# Altium PCB PCB_ATU_V1_IO_Module copy_2023-03-02.pcbdoc (part 1 of 2)
Units mm, origin at the board's own origin, x right, y up, seen from the top; angles counter-clockwise.
Board outline 157.45 x 177.29 mm, 2 copper layers (Top Layer, Bottom Layer); 216 components, 163 nets, 870 pads, 1 vias.
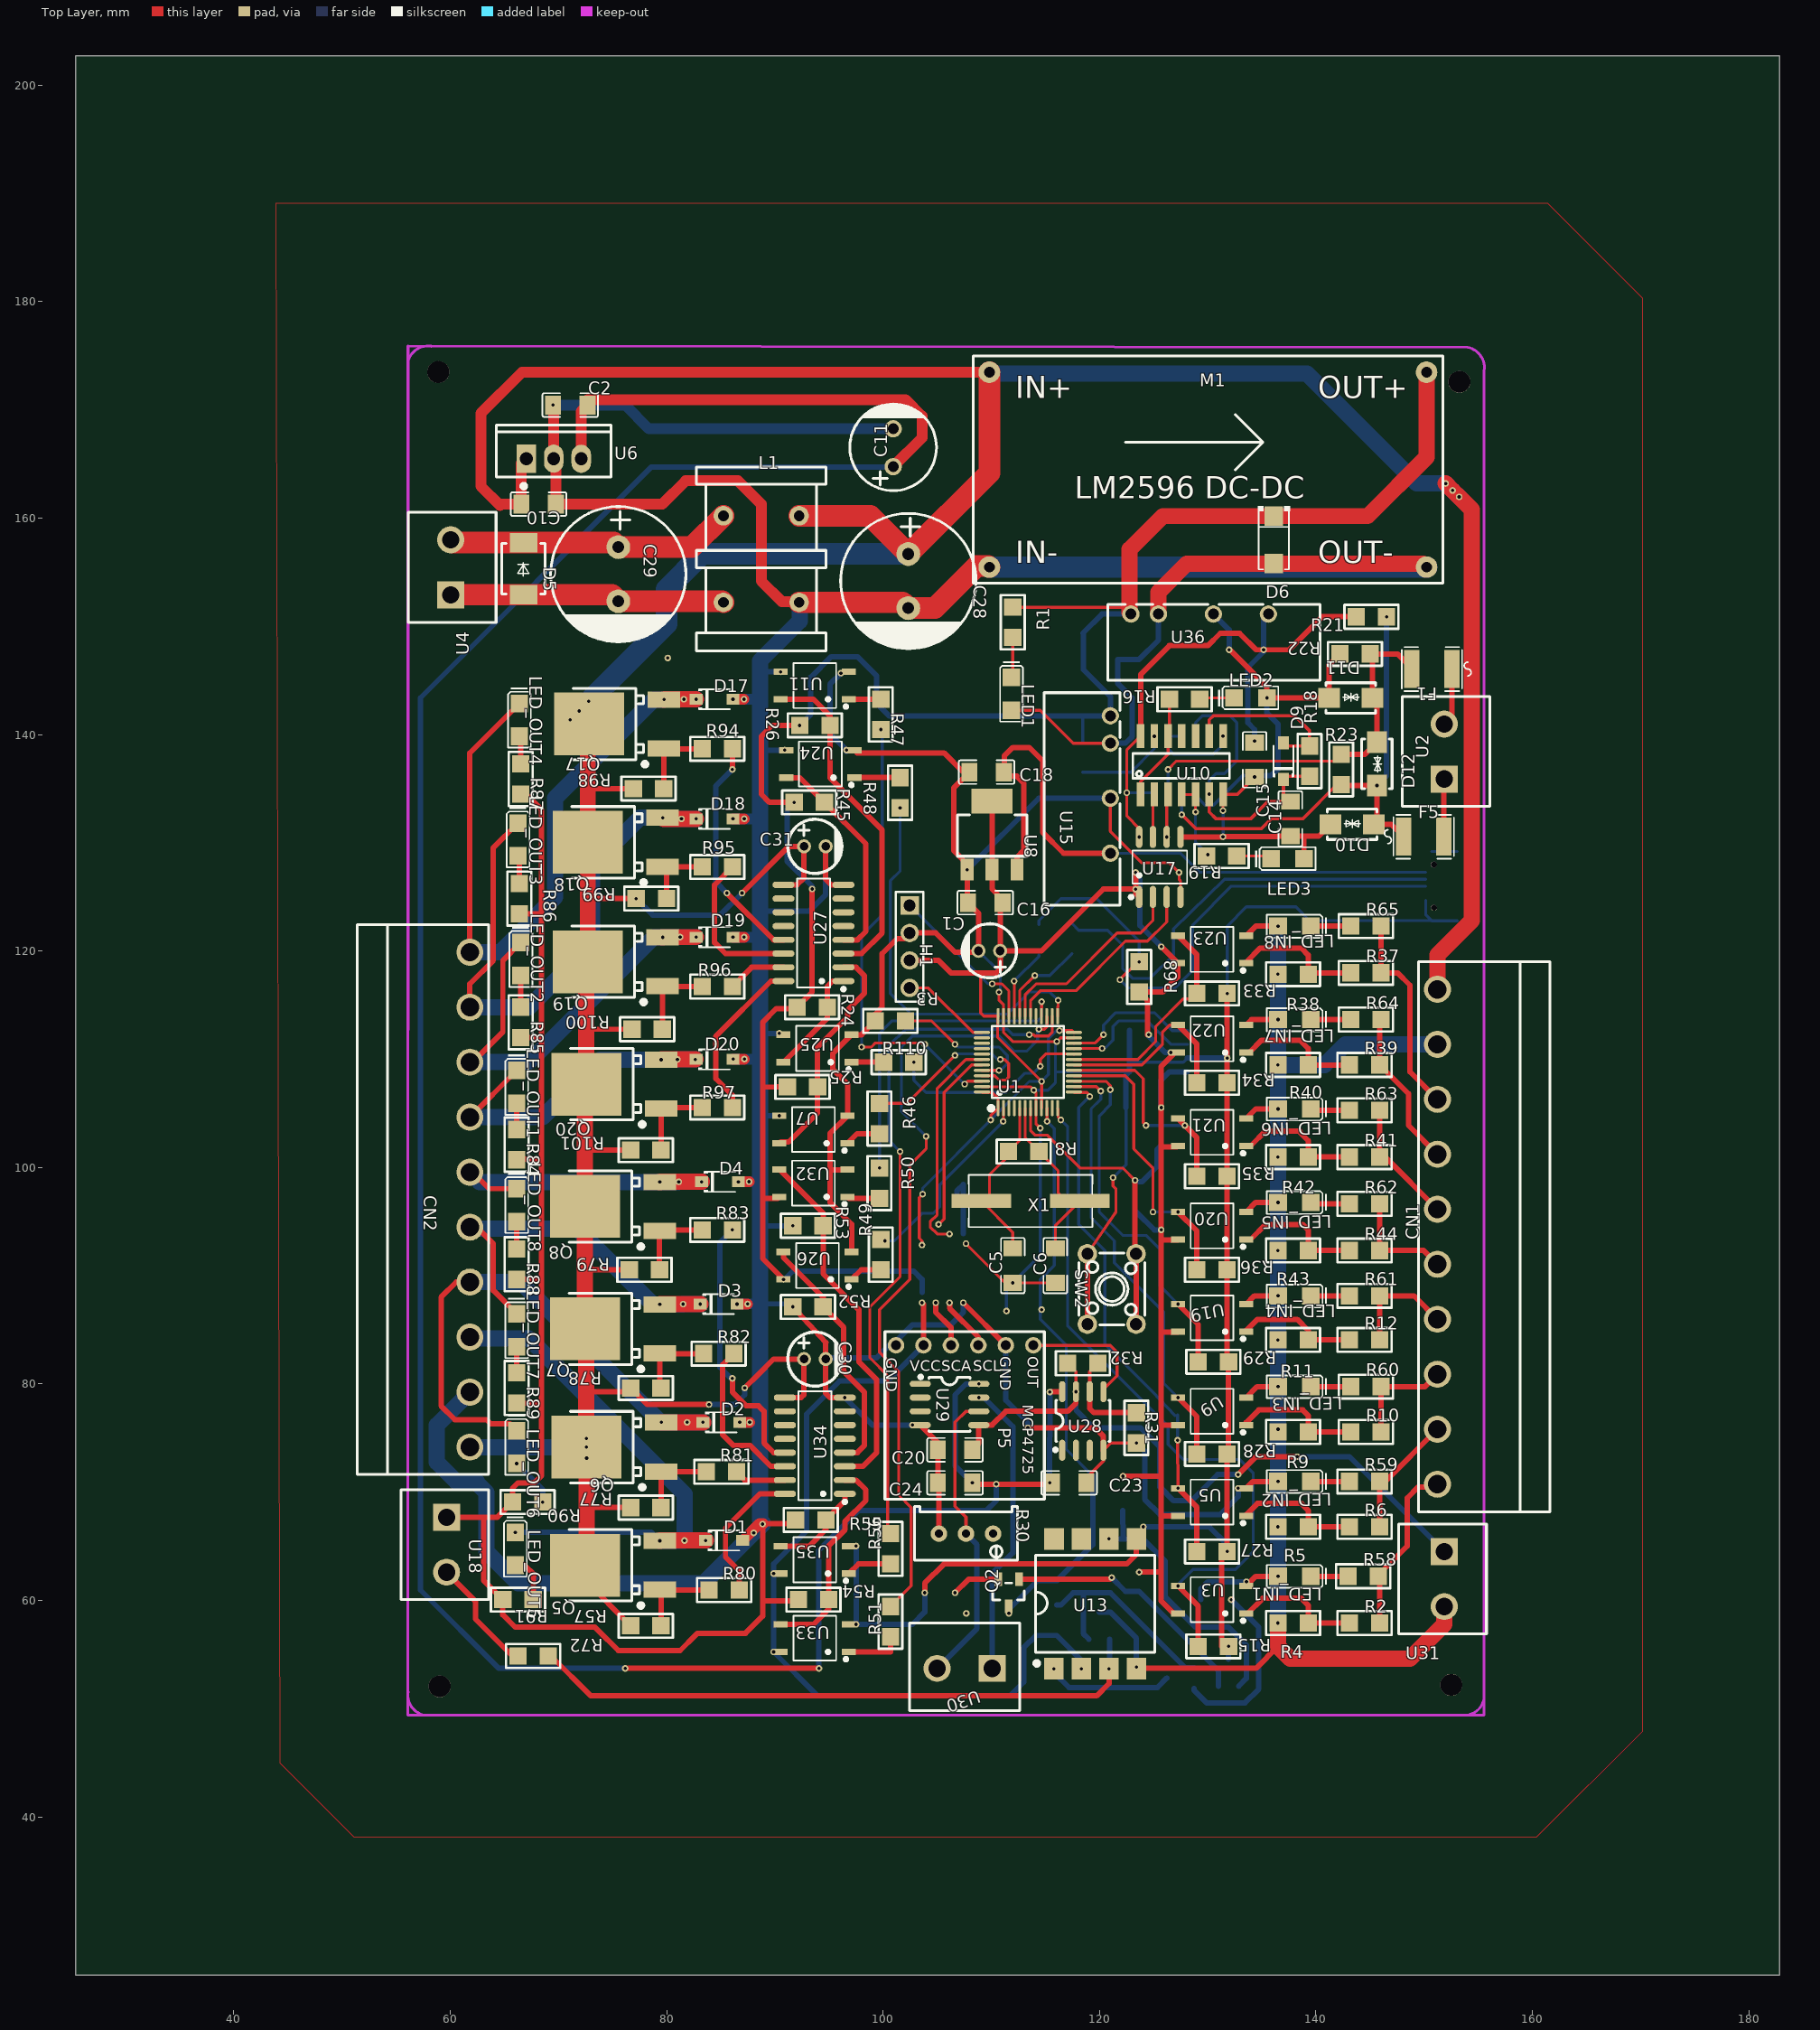
[diagram p0: Top Layer view]
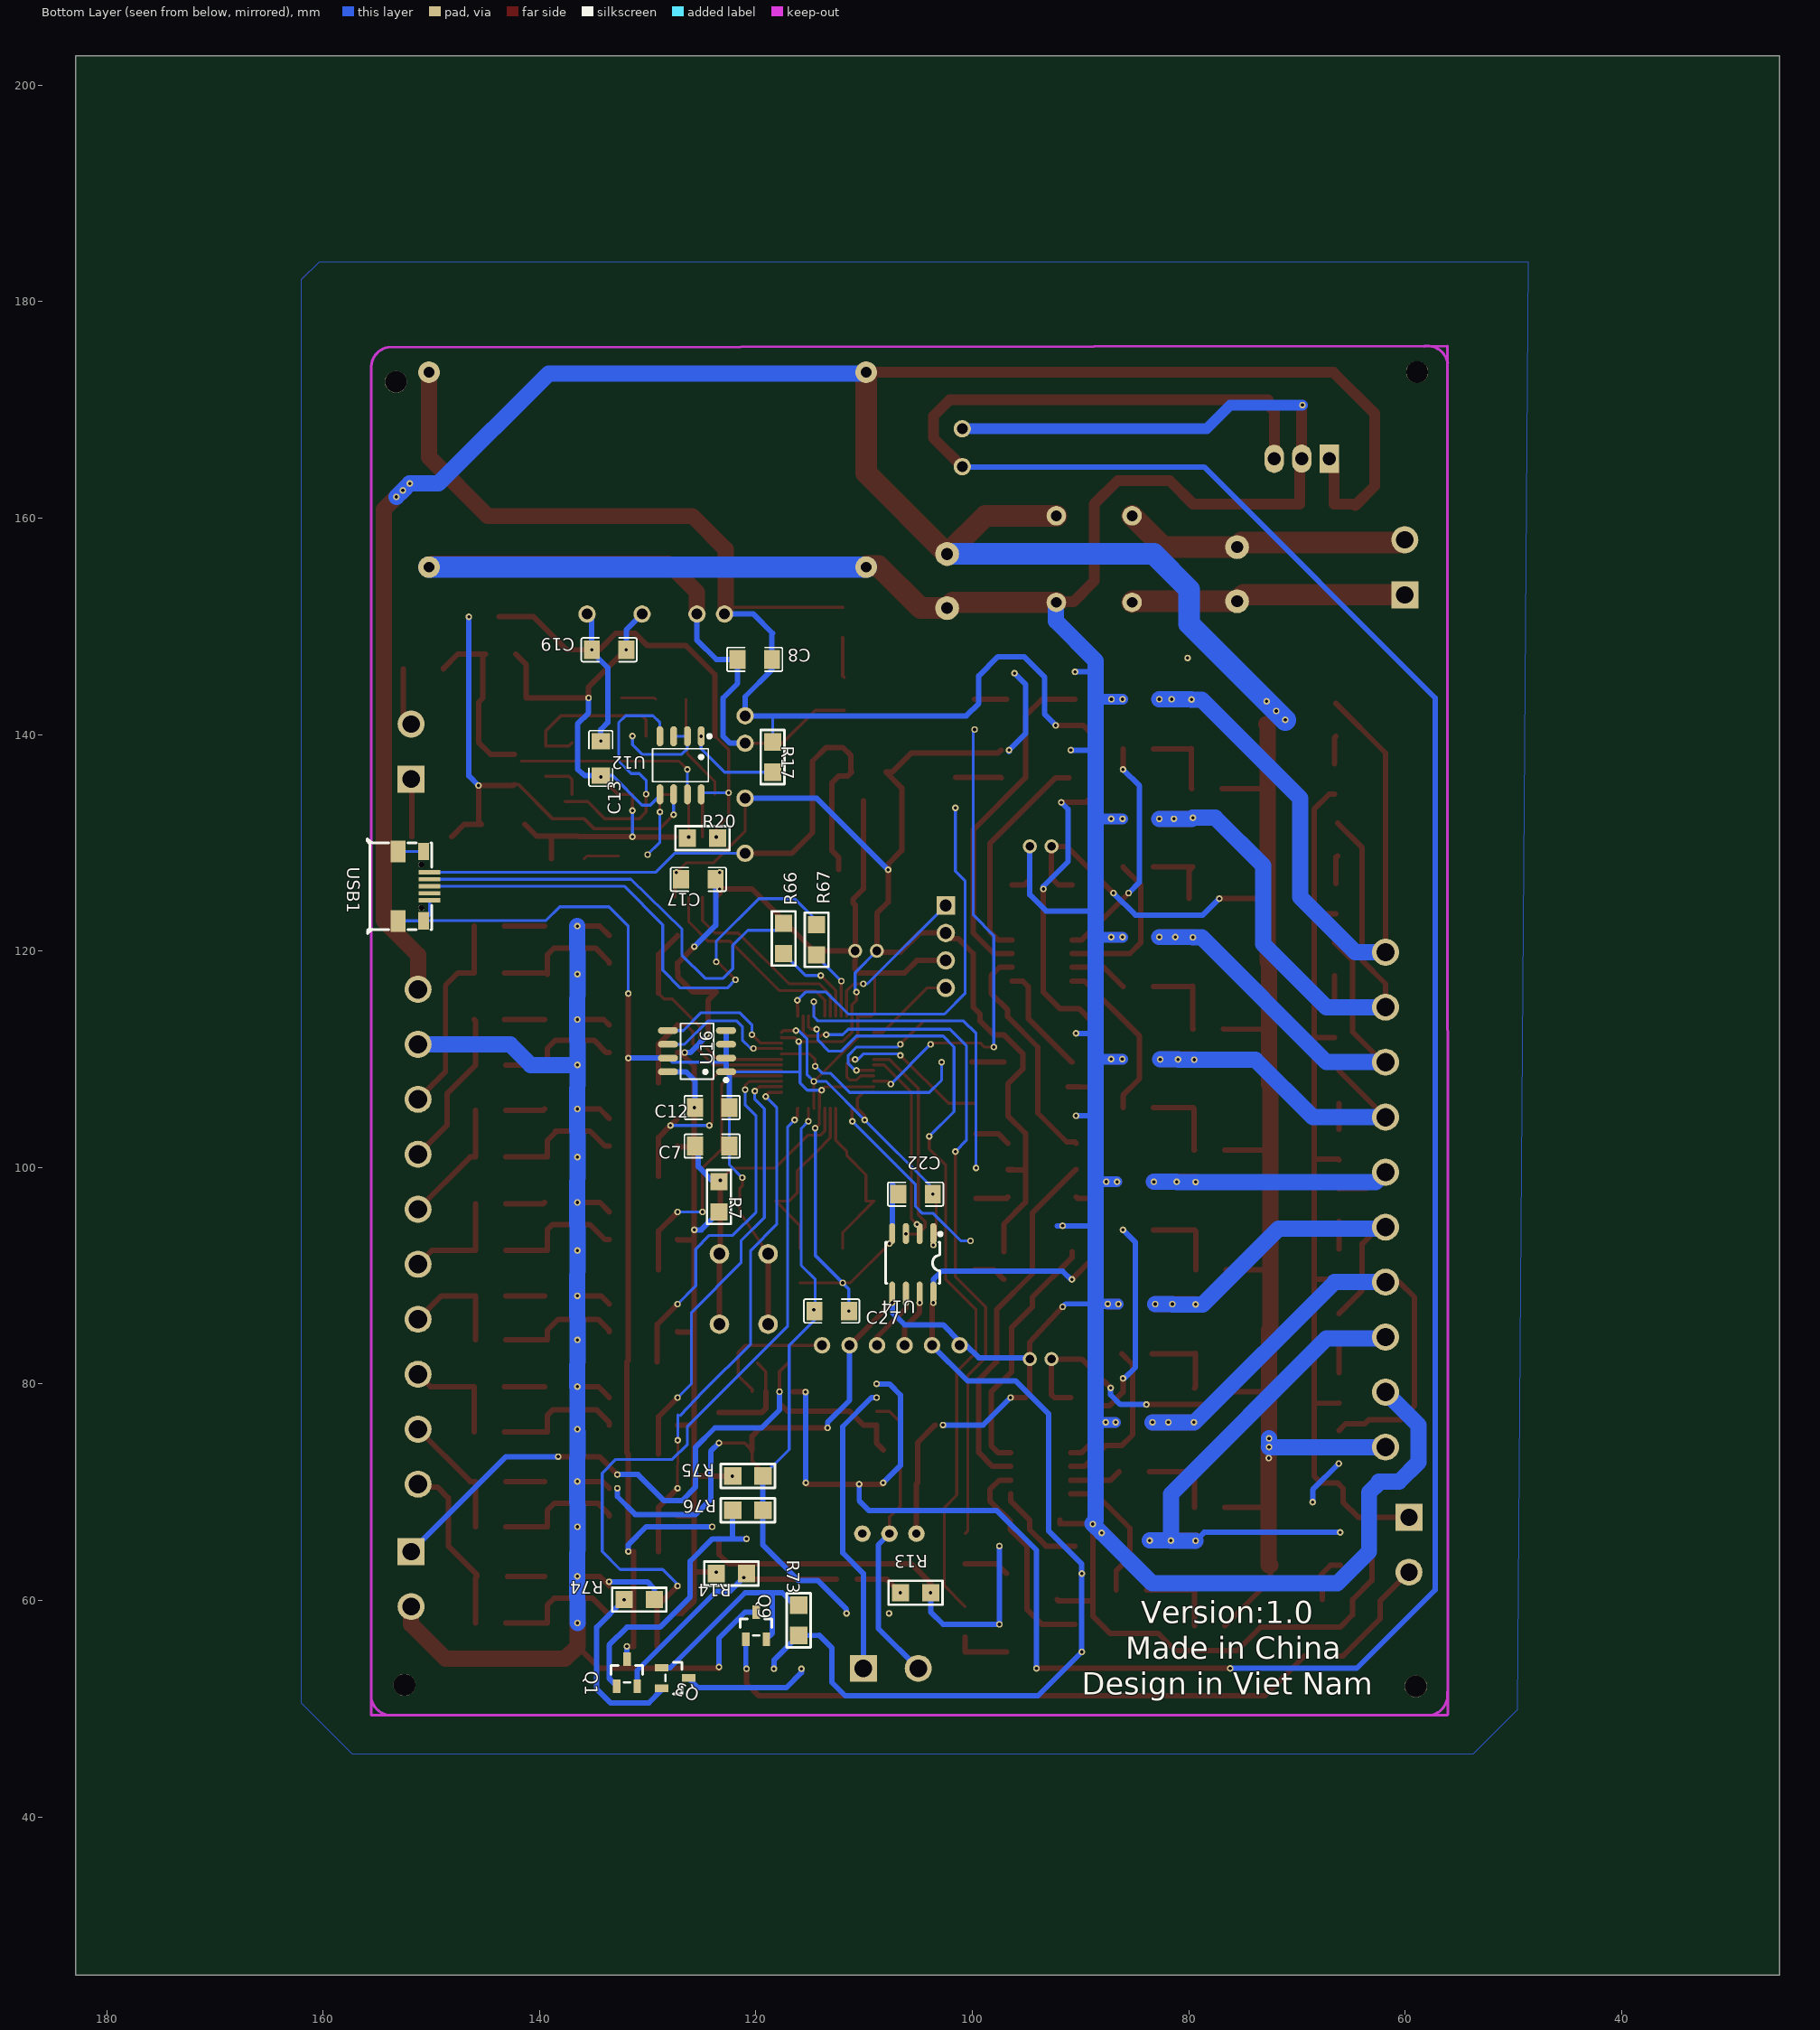
[diagram p1: Bottom Layer view, seen from below]

## Layer stack, top to bottom
Top Layer: signal copper (thickness not stored)
Dielectric: dielectric 0.32, FR-4, Dk 4.8
Bottom Layer: signal copper (thickness not stored)

## Board outline
182.846,25.4 25.4,25.4 25.4,202.691 182.846,202.691

## Components (designator, comment, footprint, x,y, rotation, side; value= is the part's Value field where it differs from the comment)
C1 "10uF" CAP-TH_BD5.0-P2.00-D0.8-FD 109.821,120.015 r180 top
C2 "100nF" C1206#1 71.086,170.434 r0 top
C5 "22pF" C1206#1 111.98,90.932 r90 top
C6 "22pF" C1206#1 115.917,90.932 r90 top
C7 "104" C1206#2 124.045,101.981 r180 bottom
C8 "100nF" C1206#2 120.108,146.939 r180 bottom
C10 "100nF" C1206#1 68.165,161.29 r180 top
C11 "100uF" CAP-TH_BD8.0-P3.50-D0.6-FD 100.931,166.497 r90 top
C12 "100nF" C1206#2 124.045,105.537 r0 bottom
C13 "100nF" C1206#2 134.332,137.795 r270 bottom
C14 "100nF" C1206#1 137.634,132.207 r90 top
C15 "100nF" C1206#1 134.332,137.668 r90 top
C16 "100nF" C1206#1 109.44,124.46 r0 top
C17 "100nF" C1206#2 125.315,126.619 r180 bottom
C18 "100nF" C1206#1 109.567,136.525 r0 top
C19 "100nF" C1206#2 133.57,147.828 r180 bottom
C20 "100nF" C1206#1 106.646,73.914 r180 top
C22 "100nF" C1206#2 105.249,97.536 r180 bottom
C23 "100nF" C1206#1 117.187,70.866 r0 top
C24 "100nF" C1206#1 106.646,70.866 r0 top
C27 "1nF" C1206#2 112.996,86.741 r0 bottom
C28 "1000uF" CAP-TH_BD12.5-P5.00-D0.6-FD 102.328,154.178 r270 top
C29 "1000uF" CAP-TH_BD12.5-P5.00-D0.6-FD 75.531,154.813 r270 top
C30 "10uF" CAP-TH_BD5.0-P2.00-D0.8-FD 93.692,82.296 r0 top
C31 "10uF" CAP-TH_BD5.0-P2.00-D0.8-FD 93.692,129.667 r0 top
CN1 "JL2EDGR-50810G01" CONN-TH_10P-P5.08_JL2EDGR 151.223,93.599 r90 top
CN2 "JL2EDGR-50810G01" CONN-TH_10P-P5.08_JL2EDGR 61.815,97.028 r270 top
D1 "1N4148W" SOD-123F_L2.7-W1.7-LS3.7-RD-1 85.31,65.532 r0 top
D2 "1N4148W" SOD-123F_L2.7-W1.7-LS3.7-RD-1 85.056,76.454 r0 top
D3 "1N4148W" SOD-123F_L2.7-W1.7-LS3.7-RD-1 84.802,87.376 r0 top
D4 "1N4148W" SOD-123F_L2.7-W1.7-LS3.7-RD-1 84.929,98.679 r0 top
D5 "SMBJ30A" SMB_L4.6-W3.6-LS5.3-R-RD 66.768,155.321 r270 top
D6 "P4SMA6.8A" SMA_L4.4-W2.6-LS5.0-RD 136.11,157.988 r270 top
D9 "1N4148" SOD-123F_L2.7-W1.7-LS3.7-RD-1 136.999,137.541 r90 top
D10 "SMAJ6.8CA" SMA_L4.4-W2.6-LS5.0-BI 143.349,131.699 r180 top
D11 "SMAJ6.8CA" SMA_L4.4-W2.6-LS5.0-BI 143.222,143.383 r180 top
D12 "SMAJ6.8CA" SMA_L4.4-W2.6-LS5.0-BI 145.635,137.287 r90 top
D17 "1N4148W" SOD-123F_L2.7-W1.7-LS3.7-RD-1 84.421,143.256 r0 top
D18 "1N4148W" SOD-123F_L2.7-W1.7-LS3.7-RD-1 84.421,132.207 r0 top
D19 "1N4148W" SOD-123F_L2.7-W1.7-LS3.7-RD-1 84.421,121.285 r0 top
D20 "1N4148W" SOD-123F_L2.7-W1.7-LS3.7-RD-1 84.421,109.982 r0 top
F1 "MF-MSMF010-2" F1812 150.715,146.05 r180 top
F5 "MF-MSMF010-2" F1812 149.953,130.556 r0 top
H1 "." HDR-TH_4P-P2.54-V-M-1 102.455,120.396 r270 top
L1 "Guangdong" FILTER-TH_4P-L16.5-W11.5-P8.00-D0.6-S7.00 88.739,156.21 r0 top
LED1 "red" LED1206-RD 111.853,143.764 r270 top
LED2 "red" LED1206-RD 133.951,143.383 r0 top
LED3 "red" LED1206-RD 137.38,128.524 r0 top
LED_IN1 "red" LED1206-RD 138.015,62.23 r180 top
LED_IN2 "red" LED1206-RD 138.015,70.993 r180 top
LED_IN3 "red" LED1206-RD 138.015,79.756 r180 top
LED_IN4 "red" LED1206-RD 138.015,88.138 r180 top
LED_IN5 "red" LED1206-RD 138.015,96.774 r180 top
LED_IN6 "red" LED1206-RD 138.015,105.41 r180 top
LED_IN7 "red" LED1206-RD 138.015,113.665 r180 top
LED_IN8 "red" LED1206-RD 138.015,122.301 r180 top
LED_OUT1 "red" LED1206-RD 66.133,107.442 r270 top
LED_OUT2 "red" LED1206-RD 66.514,119.253 r270 top
LED_OUT3 "red" LED1206-RD 66.26,130.302 r270 top
LED_OUT4 "red" LED1206-RD 66.387,141.351 r270 top
LED_OUT5 "red" LED1206-RD 66.006,64.77 r270 top
LED_OUT6 "red" LED1206-RD 66.133,74.168 r270 top
LED_OUT7 "red" LED1206-RD 66.133,84.963 r270 top
LED_OUT8 "red" LED1206-RD 66.133,96.52 r270 top
M1 "LM2596 DC-DC MODULE COPY" "LM2596 MODULE" 130.014,164.465 r0 top
P5 "MCP4725" "MCP4725 CHINESE BOARD 0X60H" 107.535,77.089 r270 top
Q1 "2N3906S" SOT-23-3_L2.9-W1.5-P1.90-LS2.6-TR 131.919,53.34 r90 bottom
Q2 "2n3904S" SOT-23-3_L2.9-W1.3-P1.90-LS2.4-TR#1 111.599,60.706 r90 top
Q3 "2n3904S" SOT-23-3_L2.9-W1.3-P1.90-LS2.4-TR#2 127.474,52.832 r180 bottom
Q5 "TIP127" TO-252-3_L6.5-W5.8-P4.58-TL 75.912,63.246 r180 top
Q6 "TIP127" TO-252-3_L6.5-W5.8-P4.58-TL 76.039,74.168 r180 top
Q7 "TIP127" TO-252-3_L6.5-W5.8-P4.58-TL 75.912,85.09 r180 top
Q8 "TIP127" TO-252-3_L6.5-W5.8-P4.58-TL 75.912,96.393 r180 top
Q9 "2N3906S" SOT-23-3_L2.9-W1.5-P1.90-LS2.6-TR 119.981,57.658 r90 bottom
Q17 "TIP127" TO-252-3_L6.5-W5.8-P4.58-TL 76.293,140.97 r180 top
Q18 "TIP127" TO-252-3_L6.5-W5.8-P4.58-TL 76.166,130.048 r180 top
Q19 "TIP127" TO-252-3_L6.5-W5.8-P4.58-TL 76.166,118.999 r180 top
Q20 "TIP127" TO-252-3_L6.5-W5.8-P4.58-TL 76.039,107.696 r180 top
R1 "1k5" R1206#1 111.98,150.368 r90 top
R2 "910" R1206#1 144.492,57.912 r0 top
R3 "10k" R1206#1 100.677,113.538 r180 top
R4 "240R" R1206#1 137.888,57.912 r0 top
R5 "240R" R1206#1 137.888,66.802 r0 top
R6 "910" R1206#1 144.492,66.802 r0 top
R7 "10k" R1206#2 123.41,97.282 r90 bottom
R8 "1M" R1206#1 112.996,101.473 r180 top
R9 "240R" R1206#1 137.888,75.565 r0 top
R10 "910" R1206#1 144.619,75.565 r0 top
R11 "240R" R1206#1 137.888,84.074 r0 top
R12 "910" R1206#1 144.492,84.074 r0 top
R13 "10R" R1206#2 105.249,60.706 r180 bottom
R14 "10k" R1206#2 122.267,62.484 r180 bottom
R15 "10k" R1206#1 130.522,55.753 r180 top
R16 "330" R1206#1 127.855,143.256 r180 top
R17 "4k7" R1206#2 118.457,137.922 r270 bottom
R18 "1k" R1206#1 139.412,137.541 r90 top
R19 "330" R1206#1 131.284,128.778 r180 top
R20 "4k7" R1206#2 124.934,130.429 r0 bottom
R21 "4k7" R1206#1 145.127,150.876 r0 top
R22 "4k7" R1206#1 143.603,147.447 r180 top
R23 "120" R1206#1 142.333,136.779 r270 top
R24 "1k5" R1206#1 93.438,114.808 r0 top
R25 "1k5" R1206#1 92.549,107.442 r180 top
R26 "1k5" R1206#1 93.692,140.843 r180 top
R27 "10k" R1206#1 130.395,64.516 r180 top
R28 "10k" R1206#1 130.395,73.533 r180 top
R29 "10k" R1206#1 130.522,82.042 r180 top
R30 "500" RES-ADJ-TH_3P-L9.5-W4.85-P2.50-BL-BS 107.662,66.167 r270 top
R31 "10k" R1206#1 123.41,75.946 r270 top
R32 "10k" R1206#1 118.457,81.915 r180 top
R33 "10k" R1206#1 130.395,116.078 r180 top
R34 "10k" R1206#1 130.395,107.823 r180 top
R35 "10k" R1206#1 130.395,99.187 r180 top
R36 "10k" R1206#1 130.395,90.551 r180 top
R37 "910" R1206#1 144.619,117.983 r0 top
R38 "240R" R1206#1 137.888,117.856 r0 top
R39 "910" R1206#1 144.492,109.474 r0 top
R40 "240R" R1206#1 137.888,109.474 r0 top
R41 "910" R1206#1 144.492,100.965 r0 top
R42 "240R" R1206#1 137.888,100.965 r0 top
R43 "240R" R1206#1 137.888,92.329 r0 top
R44 "910" R1206#1 144.492,92.329 r0 top
R45 "1k5" R1206#1 93.184,133.731 r180 top
R46 "100" R1206#1 99.661,104.521 r90 top
R47 "100" R1206#1 99.788,141.859 r270 top
R48 "100" R1206#1 101.566,134.62 r270 top
R49 "100" R1206#1 99.788,91.948 r90 top
R50 "100" R1206#1 99.661,98.552 r90 top
R51 "100" R1206#1 100.677,58.039 r90 top
R52 "1k5" R1206#1 93.057,87.122 r180 top
R53 "1k5" R1206#1 93.057,94.615 r180 top
R54 "1k5" R1206#1 93.565,60.071 r180 top
R55 "1k5" R1206#1 93.311,67.437 r0 top
R56 "100" R1206#1 100.677,64.77 r90 top
R57 "10k" R1206#1 78.071,57.658 r180 top
R58 "1k5" R1206#1 144.365,62.23 r0 top
R59 "1k5" R1206#1 144.492,70.993 r0 top
R60 "1k5" R1206#1 144.619,79.756 r0 top
R61 "1k5" R1206#1 144.492,88.138 r0 top
R62 "1k5" R1206#1 144.492,96.647 r0 top
R63 "1k5" R1206#1 144.492,105.283 r0 top
R64 "1k5" R1206#1 144.619,113.665 r0 top
R65 "1k5" R1206#1 144.619,122.301 r0 top
R66 "22R" R1206#2 117.441,121.158 r270 bottom
R67 "22R" R1206#2 114.393,121.031 r270 bottom
R68 "1k5" R1206#1 123.664,117.602 r90 top
R72 "68k" R1206#1 67.657,54.864 r180 top
R73 "1k8" R1206#2 116.044,58.166 r90 bottom
R74 "10R" R1206#2 130.776,60.071 r180 bottom
R75 "470R" R1206#2 120.743,71.501 r180 bottom
R76 "22k" R1206#2 120.743,68.326 r180 bottom
R77 "10k" R1206#1 78.071,68.58 r180 top
R78 "10k" R1206#1 78.071,79.629 r180 top
R79 "10k" R1206#1 77.944,90.551 r180 top
R80 "120R" R1206#1 85.31,60.96 r0 top
R81 "120R" R1206#1 85.056,71.882 r0 top
R82 "120R" R1206#1 84.802,82.804 r0 top
R83 "120R" R1206#1 84.675,94.234 r0 top
R84 "1k5" R1206#1 66.133,102.108 r270 top
R85 "1k5" R1206#1 66.514,113.411 r270 top
R86 "1k5" R1206#1 66.387,124.841 r270 top
R87 "1k5" R1206#1 66.514,135.89 r270 top
R88 "1k5" R1206#1 66.133,91.059 r270 top
R89 "1k5" R1206#1 66.133,79.629 r270 top
R90 "1k5" R1206#1 67.149,69.088 r180 top
R91 "1k5" R1206#1 66.26,60.071 r180 top
R94 "120R" R1206#1 84.675,138.684 r0 top
R95 "120R" R1206#1 84.675,127.762 r0 top
R96 "120R" R1206#1 84.675,116.713 r0 top
R97 "120R" R1206#1 84.675,105.537 r0 top
R98 "10k" R1206#1 78.325,135.001 r180 top
R99 "10k" R1206#1 78.579,124.841 r180 top
R100 "10k" R1206#1 78.198,112.776 r180 top
R101 "10k" R1206#1 78.071,101.6 r180 top
R110 "100" R1206#1 101.439,109.728 r0 top
SW2 "button" KEY-TH_4P-L6.0-W6.0-P4.50-LS6.5 121.124,88.773 r270 top
U1 "STM32F103C8T6" LQFP-48_L7.0-W7.0-P0.50-LS9.0-BL 113.377,109.728 r0 top
U2 "rs485" CONN-TH_DG127-5.08-02P-14-02A 151.858,138.43 r90 top
U3 "LTV357T-B" SOP-4_L4.4-W4.0-P2.54-LS7.0-TL 130.395,60.071 r180 top
U4 "12-24vdc" CONN-TH_DG127-5.08-02P-14-02A 60.037,155.448 r90 top
U5 "LTV357T-B" SOP-4_L4.4-W4.0-P2.54-LS7.0-TL 130.395,69.088 r180 top
U6 "7812" TO-220-3_L10.0-W4.5-P2.54-L 69.562,165.481 r0 top
U7 "LTV357T-B" SOP-4_L4.4-W4.0-P2.54-LS7.0-TL 93.565,103.505 r180 top
U8 "AMS1117-3.3" PG-SOT223-4_L6.5-W3.5-P2.30-LS7.0-BR 110.075,130.683 r270 top
U9 "LTV357T-B" SOP-4_L4.4-W4.0-P2.54-LS7.0-TL 130.395,77.47 r180 top
U10 "CD4069" SOP-14 127.601,137.16 r0 top
U11 "LTV357T-B" SOP-4_L4.4-W4.0-P2.54-LS7.0-TL 93.692,144.526 r180 top
U12 "MAX485ED" SOP-8_L4.9-W3.9-P1.27-LS6.0-BL 126.966,137.16 r180 bottom
U13 "HCNR201-500E" OPTO-SMD-8P_L11.0-W9.0-P2.54-LS12.4-BL 119.6,59.69 r0 top
U14 "π120U31" SOIC-8_L5.0-W4.0-P1.27-LS6.0-BL#1 105.503,91.186 r180 bottom
U15 "IB0505S-2W" PWRM-TH_IBXXXXS-2W 120.997,135.382 r270 top
U16 "AT24C32M/TR" SOP-8_L4.9-W3.9-P1.27-LS6.0-BL 125.442,110.744 r270 bottom
U17 "π122U31" SOIC-8_L4.9-W3.9-P1.27-LS6.0-BL 125.569,127.762 r0 top
U18 "0-10V IN" CONN-TH_DG127-5.08-02P-14-02A 59.656,65.151 r270 top
U19 "LTV357T-B" SOP-4_L4.4-W4.0-P2.54-LS7.0-TL 130.395,86.106 r180 top
U20 "LTV357T-B" SOP-4_L4.4-W4.0-P2.54-LS7.0-TL 130.395,94.615 r180 top
U21 "LTV357T-B" SOP-4_L4.4-W4.0-P2.54-LS7.0-TL 130.395,103.251 r180 top
U22 "LTV357T-B" SOP-4_L4.4-W4.0-P2.54-LS7.0-TL 130.395,111.887 r180 top
U23 "LTV357T-B" SOP-4_L4.4-W4.0-P2.54-LS7.0-TL 130.395,120.142 r180 top
U24 "LTV357T-B" SOP-4_L4.4-W4.0-P2.54-LS7.0-TL 94.2,137.287 r180 top
U25 "LTV357T-B" SOP-4_L4.4-W4.0-P2.54-LS7.0-TL 93.946,110.998 r180 top
U26 "LTV357T-B" SOP-4_L4.4-W4.0-P2.54-LS7.0-TL 93.946,90.932 r180 top
U27 "ULN2003" SOP-16_L9.9-W3.9-P1.27-LS6.0-BL 93.565,121.666 r90 top
U28 "LM358D" SOIC-8_L5.0-W4.0-P1.27-LS6.0-BL#2 118.457,76.581 r0 top
U29 "LM358D" SOIC-8_L5.0-W4.0-P1.27-LS6.0-BL#2 106.138,78.105 r270 top
U30 "0-20ma" CONN-TH_DG127-5.08-02P-14-02A 107.535,53.721 r180 top
U31 "0-10v" CONN-TH_DG127-5.08-02P-14-02A 151.858,61.976 r270 top
U32 "LTV357T-B" SOP-4_L4.4-W4.0-P2.54-LS7.0-TL 93.565,98.552 r180 top
U33 "LTV357T-B" SOP-4_L4.4-W4.0-P2.54-LS7.0-TL 93.692,56.515 r180 top
U34 "ULN2003" SOP-16_L9.9-W3.9-P1.27-LS6.0-BL 93.692,74.295 r90 top
U35 "LTV357T-B" SOP-4_L4.4-W4.0-P2.54-LS7.0-TL 93.692,63.754 r180 top
U36 "IB0505S-2W" PWRM-TH_IBXXXXS-2W 129.252,151.13 r0 top
USB1 "MICROQTJ" MICRO-USB-SMD_MICROQTJ 151.604,125.984 r90 bottom
X1 "8MHz" HC-49S_L11.4-W4.8 113.631,96.901 r0 top
? "" ? 105.63,188.468 r0 top
? "" ? 47.189,112.712 r0 top

## Footprints (in the part's own frame and the unit in brackets; to place one, negate y for a bottom-side part, rotate by r counter-clockwise, add the part's x,y. Pads: shape width x height; smd on the part's side, far side on the other; paste and mask are expansions set on the pad)
C1206#1 [mm]
  rect 1.485x1.728 smd: 1(-1.593,0) 2(1.593,0)
  silkscreen extent -2.56,-1.09 2.56,1.09
C1206#2 [mm]
  rect 1.485x1.728 smd: 1(1.593,0) 2(-1.593,0)
  silkscreen extent -2.56,-1.09 2.56,1.09
CAP-TH_BD5.0-P2.00-D0.8-FD [mm]
  round 1.3 hole 0.8: 1(-1,0) 2(1,0)
  silkscreen extent -2.5,-2.5 2.5,2.5
CAP-TH_BD8.0-P3.50-D0.6-FD [mm]
  round 1.6 hole 1: 1(-1.75,0) 2(1.75,0)
  silkscreen extent -3.96,-4 4.04,4
CAP-TH_BD12.5-P5.00-D0.6-FD [mm]
  round 2.2 hole 1.1: 1(-2.5,0) 2(2.5,0)
  silkscreen extent -6.25,-6.25 6.25,6.25
CONN-TH_10P-P5.08_JL2EDGR [mm]
  round 2.5 hole 1.7: 1(-22.86,0) 2(-17.78,0) 3(-12.7,0) 4(-7.62,0) 5(-2.54,0) 6(2.54,0) 7(7.62,0) 8(12.7,0) 9(17.78,0) 10(22.86,0)
  silkscreen extent -25.4,-10.4 25.4,1.75
CONN-TH_DG127-5.08-02P-14-02A [mm]
  rect 2.5x2.5 hole 1.6: 1(-2.54,0)
  round 2.5 hole 1.6: 2(2.54,0)
  silkscreen extent -5.08,-4.2 5.08,3.9
F1812 [mm]
  rect 1.407x3.499 smd: 1(-1.853,0) 2(1.853,0)
  silkscreen extent -3.62,-2.03 2.79,2.03
FILTER-TH_4P-L16.5-W11.5-P8.00-D0.6-S7.00 [mm]
  round 1.8 hole 1: 1(-3.5,-4) 2(3.5,-4) 3(3.5,4) 4(-3.5,4)
  silkscreen extent -6,-8.5 6,8.5
HC-49S_L11.4-W4.8 [mm]
  rect 5.5x1.3 smd: 1(4.553,0) 2(-4.553,0)
  silkscreen extent -5.71,-2.41 5.71,2.41
HDR-TH_4P-P2.54-V-M-1 [mm]
  rect 1.7x1.7 hole 1.1: 1(-3.81,0)
  round 1.7 hole 1.1: 2(-1.27,0) 3(1.27,0) 4(3.81,0)
  silkscreen extent -5.08,-1.27 5.08,1.27
KEY-TH_4P-L6.0-W6.0-P4.50-LS6.5 [mm]
  round 1.8 hole 1.1: 1(-3.251,-2.25) 2(3.251,-2.25) 3(3.251,2.25) 4(-3.251,2.25)
  silkscreen extent -3.3,-3.05 3.3,3.05
LED1206-RD [mm]
  rect 1.635x1.6 smd: 1(-1.517,0) 2(1.517,0)
  silkscreen extent -2.99,-1.04 2.57,1.07
"LM2596 MODULE" [mm]
  round 2 hole 1: 1(-20.201,8.999) 2(-20.201,-8.999) 3(20.201,-8.999) 4(20.201,8.999)
  silkscreen extent -21.7,-10.5 21.7,10.5
LQFP-48_L7.0-W7.0-P0.50-LS9.0-BL [mm]
  oval 0.27x1.5 smd: 1(-2.75,-4.25) 2(-2.25,-4.25) 3(-1.75,-4.25) 4(-1.25,-4.25) 5(-0.75,-4.25) 6(-0.25,-4.25) 7(0.25,-4.25) 8(0.75,-4.25) 9(1.25,-4.25) 10(1.75,-4.25) 11(2.25,-4.25) 12(2.75,-4.25) 25(2.75,4.25) 26(2.25,4.25) 27(1.75,4.25) 28(1.25,4.25) 29(0.75,4.25) 30(0.25,4.25) 31(-0.25,4.25) 32(-0.75,4.25) 33(-1.25,4.25) 34(-1.75,4.25) 35(-2.25,4.25) 36(-2.75,4.25)
  oval 1.5x0.27 smd: 13(4.25,-2.75) 14(4.25,-2.25) 15(4.25,-1.75) 16(4.25,-1.25) 17(4.25,-0.75) 18(4.25,-0.25) 19(4.25,0.25) 20(4.25,0.75) 21(4.25,1.25) 22(4.25,1.75) 23(4.25,2.25) 24(4.25,2.75) 37(-4.25,2.75) 38(-4.25,2.25) 39(-4.25,1.75) 40(-4.25,1.25) 41(-4.25,0.75) 42(-4.25,0.25) 43(-4.25,-0.25) 44(-4.25,-0.75) 45(-4.25,-1.25) 46(-4.25,-1.75) 47(-4.25,-2.25) 48(-4.25,-2.75)
  silkscreen extent -3.59,-4.46 3.3,3.34
"MCP4725 CHINESE BOARD 0X60H" [mil]
  round 60 hole 36: 1(-255,250) 2(-255,150) 3(-255,50) 4(-255,-50) 5(-255,-150) 6(-255,-250)
  silkscreen extent -305,-290 305,290
MICRO-USB-SMD_MICROQTJ [mm]
  rect 0.4x2 smd: 1(1.3,-1.452) 2(0.65,-1.452) 3(0,-1.452) 4(-0.65,-1.452) 5(-1.3,-1.452)
  rect 1.6x1 smd: 6(3.2,-0.902) 9(-3.2,-0.902)
  rect 2x1.4 smd: 7(3.2,1.452) 8(-3.2,1.452)
  round 0.55 hole 0.55 unplated: ""(-2,-0.698) ""(2,-0.698)
  silkscreen extent -4.38,-1.63 4.37,4.34
OPTO-SMD-8P_L11.0-W9.0-P2.54-LS12.4-BL [mm]
  rect 1.8x2 smd: 1(-3.81,-6) 2(-1.27,-6) 3(1.27,-6) 4(3.81,-6) 5(3.81,6) 6(1.27,6) 7(-1.27,6) 8(-3.8,6)
  silkscreen extent -5.6,-5.7 5.5,4.5
PG-SOT223-4_L6.5-W3.5-P2.30-LS7.0-BR [mm]
  rect 2x1.2 smd: 1(3.175,-2.3) 2(3.175,0) 3(3.175,2.3)
  rect 2.3x3.8 smd: 4(-3.175,0)
  silkscreen extent -1.87,-3.2 1.93,3.2
PWRM-TH_IBXXXXS-2W [mm]
  round 1.6 hole 1: 1(-6.35,0) 2(-3.81,0) 4(1.27,0) 6(6.35,0)
  silkscreen extent -8.48,-6.12 11.14,0.9
R1206#1 [mil]
  rect 63x63 smd: 1(-55.1,0) 2(55.1,0)
  silkscreen extent -98,-43 98,43
R1206#2 [mil]
  rect 63x63 smd: 1(55.1,0) 2(-55.1,0)
  silkscreen extent -98,-43 98,43
RES-ADJ-TH_3P-L9.5-W4.85-P2.50-BL-BS [mil]
  round 60 hole 30: 1(0,98.43) 2(0,0) 3(0,-98.42)
  silkscreen extent -98,-187 96,187
SMA_L4.4-W2.6-LS5.0-BI [mm]
  rect 2x1.8 smd: 1(-2,0) 2(2,0)
  silkscreen extent -2.3,-1.4 2.3,1.4
SMA_L4.4-W2.6-LS5.0-RD [mm]
  rect 1.8x1.7 smd: 1(-2.192,0) 2(2.192,0)
  silkscreen extent -3.11,-1.48 2.73,1.48
SMB_L4.6-W3.6-LS5.3-R-RD [mm]
  rect 1.8x2.54 smd: 1(2.4,0) 2(-2.4,0)
  silkscreen extent -2.35,-2 2.35,2
SOD-123F_L2.7-W1.7-LS3.7-RD-1 [mm]
  rect 1.2x1 smd: 1(-1.7,0) 2(1.7,0)
  silkscreen extent -1.5,-0.95 1.43,0.95
SOIC-8_L4.9-W3.9-P1.27-LS6.0-BL [mm]
  oval 0.588x2.045 smd: 1(-1.905,-2.773) 2(-0.635,-2.773) 3(0.635,-2.773) 4(1.905,-2.773) 5(1.905,2.773) 6(0.635,2.773) 7(-0.635,2.773) 8(-1.905,2.773)
  silkscreen extent -2.8,-2.92 2.53,1.52
SOIC-8_L5.0-W4.0-P1.27-LS6.0-BL#1 [mil]
  oval 22.38x76.78 smd: 1(75,106.5) 2(25,106.5) 3(-25,106.5) 4(-75,106.5) 5(-75,-106.5) 6(-25,-106.5) 7(25,-106.5) 8(75,-106.5)
  silkscreen extent -98,-75 106,111
SOIC-8_L5.0-W4.0-P1.27-LS6.0-BL#2 [mil]
  oval 22.38x76.78 smd: 1(-75,-106.5) 2(-25,-106.5) 3(25,-106.5) 4(75,-106.5) 5(75,106.5) 6(25,106.5) 7(-25,106.5) 8(-75,106.5)
  silkscreen extent -106,-111 98,75
SOP-4_L4.4-W4.0-P2.54-LS7.0-TL [mm]
  rect 1.3x0.595 smd: 1(-3.15,1.27) 2(-3.15,-1.27) 3(3.15,-1.27) 4(3.15,1.27)
  silkscreen extent -3.02,-2.08 1.97,2.09
SOP-8_L4.9-W3.9-P1.27-LS6.0-BL [mm]
  oval 0.63x1.865 smd: 1(1.905,2.682) 2(0.635,2.682) 3(-0.635,2.682) 4(-1.905,2.682) 5(-1.905,-2.682) 6(-0.635,-2.682) 7(0.635,-2.682) 8(1.905,-2.682)
  silkscreen extent -2.58,-1.52 2.82,2.83
SOP-14 [mm]
  rect 0.701x2.2 smd: 1(-3.81,-2.7) 2(-2.54,-2.7) 3(-1.27,-2.7) 4(0,-2.7) 5(1.27,-2.7) 6(2.54,-2.7) 7(3.81,-2.7) 8(3.81,2.7) 9(2.54,2.7) 10(1.27,2.7) 11(0,2.7) 12(-1.27,2.7) 13(-2.54,2.7) 14(-3.81,2.7)
  silkscreen extent -4.51,-1.2 4.41,1.1
SOP-16_L9.9-W3.9-P1.27-LS6.0-BL [mm]
  oval 0.574x2.038 smd: 1(-4.445,-2.769) 2(-3.175,-2.769) 3(-1.905,-2.769) 4(-0.635,-2.769) 5(0.635,-2.769) 6(1.905,-2.769) 7(3.175,-2.769) 8(4.445,-2.769) 9(4.445,2.769) 10(3.175,2.769) 11(1.905,2.769) 12(0.635,2.769) 13(-0.635,2.769) 14(-1.905,2.769) 15(-3.175,2.769) 16(-4.445,2.769)
  silkscreen extent -5.33,-2.92 5.03,1.52
SOT-23-3_L2.9-W1.3-P1.90-LS2.4-TR#1 [mm]
  rect 1.25x0.7 smd: 1(1.25,0.95) 2(1.25,-0.95) 3(-1.25,0)
  silkscreen extent -0.65,-1.46 0.9,1.46
SOT-23-3_L2.9-W1.3-P1.90-LS2.4-TR#2 [mm]
  rect 1.25x0.7 smd: 1(-1.25,-0.95) 2(-1.25,0.95) 3(1.25,0)
  silkscreen extent -0.9,-1.46 0.65,1.46
SOT-23-3_L2.9-W1.5-P1.90-LS2.6-TR [mm]
  rect 1.25x0.7 smd: 1(-1.25,-0.95) 2(-1.25,0.95) 3(1.25,0)
  silkscreen extent -0.9,-1.46 0.65,1.46
TO-220-3_L10.0-W4.5-P2.54-L [mm]
  rect 1.8x2.6 hole 1.2: 1(-2.54,0.005)
  oval 1.8x2.6 hole 1.2: 2(0,0.005) 3(2.54,-0.005)
  silkscreen extent -5.3,-2.73 5.3,3.09
TO-252-3_L6.5-W5.8-P4.58-TL [mm]
  rect 3x1.5 smd: 1(-3.457,2.26) 3(-3.457,-2.26)
  rect 6.5x5.8 smd: 2(3.457,0)
  silkscreen extent -1.9,-3.3 4.92,3.91
? [mm]

## Free pads (board coordinates)
  round 0.61 hole 0.305: 2(66.006,66.287) 2(66.133,72.651) 2(68.549,69.088) 2(69.494,170.434) 2(71.086,141.351) 2(71.912,142.177) 2(72.582,74.168) 2(72.582,74.973) 2(72.61,73.152) 2(72.801,143.065) 2(77.18,124.841) 2(79.369,65.506) 2(79.369,87.35) 2(79.369,98.653) 2(79.496,109.957) 2(79.522,76.454) 2(79.623,121.26) 2(79.623,132.309) 2(79.75,143.231) 2(80.103,147.066) 2(80.103,147.066) 2(80.103,147.066) 2(80.992,109.982) 2(81.119,98.679) 2(81.246,121.285) 2(81.373,132.207) 2(81.52,87.376) 2(81.586,143.256) 2(81.647,65.532) 2(81.887,76.454) 2(82.643,109.982) 2(82.721,121.285) 2(82.721,132.207) 2(82.721,143.256) 2(83.102,87.376) 2(83.229,98.679) 2(83.356,76.454) 2(83.61,65.532) 2(83.913,78.105) 2(85.564,125.349) 2(86.072,80.518) 2(86.072,136.779) 2(86.075,94.234) 2(86.12,121.285) 2(86.12,132.207) 2(86.12,143.256) 2(86.149,110.009) 2(86.501,87.376) 2(86.628,98.679) 2(86.755,76.454) 2(86.961,125.349) 2(87.145,143.262) 2(87.162,121.28) 2(87.167,132.212) 2(87.178,110.009) 2(87.215,79.629) 2(87.479,87.386) 2(87.622,98.682) 2(87.675,76.454) 2(88.05,66.24) 2(88.866,67.056) 2(89.882,55.245) 2(89.882,62.484) 2(90.416,104.775) 2(90.416,112.395) 2(90.517,145.796) 2(90.796,89.662) 2(90.898,138.557) 2(91.658,87.122) 2(91.66,94.613) 2(91.785,133.731) 2(92.293,140.843) 2(93.438,125.73) 2(96.105,145.669) 2(96.461,78.74) 2(96.613,138.557) 2(97.502,57.785) 2(97.502,65.024) 2(98.01,111.125) 2(99.661,99.952) 2(99.788,140.459) 2(100.169,93.218) 2(101.566,101.473) 2(102.709,76.2) 2(102.839,109.728) 2(103.598,87.503) 2(103.598,92.837) 2(103.657,97.536) 2(103.85,60.706) 2(103.852,111.379) 2(103.979,102.87) 2(104.868,87.503) 2(105.122,94.742) 2(106.138,87.503) 2(106.138,93.853) 2(106.646,110.363) 2(106.646,111.379) 2(106.649,60.706) 2(107.408,87.503) 2(107.535,107.696) 2(107.662,92.964) 2(107.69,58.801) 2(107.775,127.508) 2(108.239,70.866) 2(108.843,78.74) 2(108.843,80.01) 2(109.948,104.394) 2(110.075,116.967) 2(110.456,70.739) 2(110.71,108.966) 2(110.71,116.205) 2(110.837,109.982) 2(111.091,104.267) 2(111.404,86.741) 2(111.627,58.801) 2(111.98,89.339) 2(112.107,117.221) 2(113.377,75.946) 2(113.504,112.268) 2(113.925,107.148) 2(114.012,117.729) 2(114.393,112.776) 2(114.52,103.632) 2(114.52,109.347) 2(114.647,86.868) 2(114.647,107.95) 2(114.647,115.316) 2(115.155,104.267) 2(115.395,70.866) 2(115.395,70.866) 2(115.409,79.248) 2(115.79,53.69) 2(116.044,111.633) 2(116.171,115.443) 2(116.298,112.649) 2(116.425,104.394) 2(117.822,79.286) 2(118.33,53.69) 2(119.092,106.553) 2(120.108,107.061) 2(120.235,110.998) 2(120.362,112.268) 2(120.87,53.69) 2(120.87,65.69) 2(120.997,107.188) 2(121.124,62.103) 2(121.251,99.06) 2(121.886,117.348) 2(122.172,71.472) 2(122.521,134.62) 2(123.283,98.809) 2(123.342,125.704) 2(123.342,127.254) 2(123.41,53.848) 2(123.41,74.546) 2(123.664,62.611) 2(123.664,119.002) 2(123.664,130.534) 2(124.045,66.802) 2(124.299,103.886) 2(124.553,112.268) 2(124.934,95.885) 2(125.061,139.842) 2(125.696,94.234) 2(125.696,105.537) 2(125.696,120.396) 2(126.204,130.534) 2(126.331,136.779) 2(126.585,110.617) 2(127.22,74.803) 2(127.245,87.376) 2(127.245,95.885) 2(127.246,61.341) 2(127.246,70.358) 2(127.246,78.74) 2(127.347,127.254) 2(127.601,132.588) 2(127.888,103.878) 2(128.871,132.842) 2(130.012,128.905) 2(130.141,134.493) 2(131.411,130.556) 2(131.411,132.969) 2(131.411,139.86) 2(131.795,64.516) 2(131.795,110.109) 2(131.795,116.078) 2(131.922,55.753) 2(131.978,147.828) 2(132.176,60.071) 2(132.808,70.358) 2(132.808,71.628) 2(133.57,61.722) 2(134.332,136.075) 2(134.332,139.388) 2(135.163,147.828) 2(135.468,143.383) 2(136.489,57.912) 2(136.489,66.802) 2(136.489,84.074) 2(136.489,92.329) 2(136.489,100.965) 2(136.489,109.474) 2(136.489,117.856) 2(136.498,75.819) 2(136.499,62.23) 2(136.499,70.993) 2(136.499,79.756) 2(136.499,88.138) 2(136.499,96.774) 2(136.499,105.41) 2(136.499,113.665) 2(136.499,122.301) 2(138.269,73.279) 2(145.635,135.287) 2(146.527,150.876) 2(151.985,163.195) 2(152.63,162.55) 2(153.228,161.952) 4(94.073,53.721) 5(76.166,53.721)
  round 2.032 hole 2.032 unplated: ""(58.894,173.482) ""(59.021,52.07) ""(152.493,52.197) ""(153.255,172.593)

## Via types
v1: diameter 0.61, hole 0.305, Top Layer to Bottom Layer, tented both sides, 1 vias

## Nets (pads, with @x,y where several pads share a name; then routed paths per layer and width w, separated by ;. In a path a pad name is that pad's centre, name@x,y a point inside that pad or via, vN(x,y) a via of type N, cw(c..) or ccw(c..) an arc to the next point about the centre after c; other vN are vias at no path point)
+5V: C8.1 D6.1 M1.4 P5.5 pad.2@89.882,55.245 pad.2@89.882,62.484 pad.2@90.796,89.662 pad.2@91.785,133.731 pad.2@92.293,140.843 pad.2@93.438,125.73 pad.2@103.598,87.503 pad.2@118.33,53.69 R1.2 R17.2 R24.1 R25.2 R26.2 R45.2 R73.2 U13.2 U14.8 U15.1 U26.4 U32.4 U33.4 U35.4 U36.1 | length 266.3
  Top Layer w0.3: R1.2@111.98,151.768 122.265,151.768 U36.1@122.902,151.13
  Top Layer w0.5: 88.866,97.14 90.273,97.14 U32.4@90.415,97.282 ; 88.866,107.419 90.009,107.442 R25.2@91.15,107.442 ; pad.2@90.796,89.662 88.866,91.592 88.866,106.299 88.866,113.411 90.136,114.681 91.912,114.681 R24.1@92.039,114.808 93.438,116.208 pad.2@93.438,125.73 ; R45.2@91.785,133.731 89.501,133.731 88.739,134.493 88.739,139.827 89.755,140.843 R26.2@92.293,140.843 ; pad.2@103.598,87.503 103.725,87.376 P5.5@103.725,83.566
  Top Layer w1.5: U36.1@122.902,151.13 122.775,151.257 122.775,157.099 125.857,160.181 D6.1@136.11,160.18 144.78,160.181 150.215,165.616 M1.4@150.215,173.464
  Bottom Layer w0.27: R17.2@118.457,139.322 118.457,141.732
  Bottom Layer w0.5: pad.2@90.796,89.662 90.898,89.662 91.66,90.424 102.836,90.424 103.598,89.662 U14.8@103.598,88.481 ; pad.2@91.785,133.731 91.152,133.099 91.152,128.27 93.438,125.984 pad.2@93.438,125.73 ; pad.2@92.293,140.843 93.311,141.862 93.311,145.288 95.216,147.193 97.629,147.193 99.407,145.415 99.407,142.875 100.55,141.732 U15.1@120.997,141.732 120.997,143.51 118.516,145.992 C8.1@118.516,146.939 118.516,149.294 118.457,149.352 120.235,151.13 U36.1@122.902,151.13 ; P5.5@103.725,83.566 100.423,80.264 95.978,80.264 92.93,77.216 92.93,66.421 89.882,63.373 pad.2@89.882,62.484 pad.2@89.882,55.245 93.946,51.181 111.726,51.181 112.996,52.451 112.996,55.626 114.139,56.769 R73.2@116.044,56.766 118.33,54.48 pad.2@118.33,53.69
+VO: C18.2 U8.3 U15.6 USB1.1 | length 60
  Top Layer w0.5: U8.3@112.375,127.508 112.375,128.665 112.996,129.286 112.996,135.509 112.361,136.144 111.541,136.144 C18.2@111.16,136.525 111.218,136.583 111.218,138.049 111.98,138.811 113.504,138.811 114.774,137.541 114.774,130.937 116.679,129.032 U15.6@120.997,129.032
  Bottom Layer w0.27: U15.6@120.997,129.032 127.474,129.032 129.222,127.284 USB1.1@150.152,127.284
AIN1: C27.1 pad.2@107.69,58.801 pad.2@111.627,58.801 pad.2@114.647,86.868 pad.2@115.155,104.267 Q2.3 R75.1 R76.1 U1.10 | length 53.7
  Top Layer w0.27: pad.2@115.155,104.267 U1.10@115.155,105.478
  Bottom Layer w0.27: pad.2@115.155,104.267 115.818,103.604 115.818,90.96 114.52,89.662 114.52,88.773 114.52,85.979 116.933,83.566 116.933,73.939 R75.1@119.372,71.501
  Bottom Layer w0.5: pad.2@111.627,58.801 111.627,59.182 114.294,61.849 116.072,61.849 119.374,65.151 119.372,68.326 R75.1@119.372,71.501
AIN2: U1.11
D12_1: D10.1 D12.1 F5.1 pad.2@127.601,132.588 pad.2@145.635,135.287 pad.2@146.527,150.876 R21.2 R23.2 U12.6 | length 45.1
  Top Layer w0.3: pad.2@127.601,132.588 128.871,131.318 134.967,131.318 135.856,132.207 138.777,132.207 141.95,135.379 R23.2@142.333,135.379
  Top Layer w0.5: R23.2@142.333,135.379 142.426,135.287 D12.1@145.635,135.287 145.635,131.985 D10.1@145.349,131.699 146.957,131.699 F5.1@148.1,130.556
  Bottom Layer w0.3: pad.2@127.601,132.588 U12.6@127.601,134.478
  Bottom Layer w0.5: pad.2@145.635,135.287 146.527,136.179 pad.2@146.527,150.876
D12_2: D11.1 D12.2 F1.2 pad.2@126.331,136.779 R22.1 R23.1 U12.7 | length 34.6
  Top Layer w0.27: pad.2@126.331,136.779 127.093,137.541 R23.1@141.698,137.541
  Top Layer w0.5: R23.1@142.333,138.179 144.527,138.179 D12.2@145.635,139.287 145.635,142.97 D11.1@145.222,143.383 145.222,147.228 R22.1@145.003,147.447 147.54,147.447 148.862,146.125 F1.2@148.862,146.05
  Bottom Layer w0.27: U12.7@126.331,134.478 pad.2@126.331,136.779
DI1: pad.2@116.425,104.394 pad.2@127.246,61.341 R15.2 U1.12 U3.3 | length 66.2
  Top Layer w0.27: U1.12@116.127,105.478 116.171,105.434 116.171,104.648 pad.2@116.425,104.394
  Top Layer w0.5: U3.3@127.245,61.341 129.123,59.463 R15.2@129.123,55.753
  Bottom Layer w0.27: pad.2@116.425,104.394 117.06,103.759 117.06,85.344 126.331,76.073 126.331,74.422 127.728,73.025 132.935,73.025 134.205,71.755 134.205,64.516 132.554,62.865 128.617,62.865 127.246,61.493 pad.2@127.246,61.341
DI2: pad.2@119.092,106.553 pad.2@127.22,74.803 pad.2@127.246,70.358 R27.2 U1.13 U5.3 | length 48.6
  Top Layer w0.27: U1.13@117.627,106.978 117.671,106.934 118.838,106.934 119.092,106.68 pad.2@119.092,106.553 ; pad.2@127.22,74.803 U5.3@127.245,70.358
  Top Layer w0.5: U5.3@127.245,70.358 128.996,68.607 R27.2@128.996,64.516
  Bottom Layer w0.27: pad.2@119.092,106.553 118.076,105.537 118.076,94.742 120.489,92.329 120.489,83.693 124.934,79.248 126.966,77.089 ; pad.2@127.22,74.803 127.22,77.153
DI3: pad.2@120.108,107.061 pad.2@127.246,78.74 R28.2 U1.14 U9.3 | length 40.6
  Top Layer w0.27: U1.14@117.627,107.478 119.691,107.478 pad.2@120.108,107.061
  Top Layer w0.5: U9.3@127.245,78.74 128.996,76.989 R28.2@128.996,73.533
  Bottom Layer w0.27: pad.2@120.108,107.061 120.108,106.299 119.219,105.41 119.219,95.377 121.378,93.218 121.378,91.186 125.95,86.614 125.95,80.035 pad.2@127.246,78.74
DI4: pad.2@120.997,107.188 pad.2@127.245,87.376 R29.2 U1.15 U19.3 | length 34.5
  Top Layer w0.27: U1.15@117.627,107.978 117.655,107.95 120.616,107.95 120.997,107.569 pad.2@120.997,107.188
  Top Layer w0.5: pad.2@127.245,87.376 129.123,85.498 R29.2@129.123,82.042
  Bottom Layer w0.27: pad.2@120.997,107.188 120.997,105.791 119.981,104.775 119.981,95.885 122.14,93.726 122.648,93.726 124.299,93.726 125.569,92.456 125.569,89.052 pad.2@127.245,87.376
DI5: pad.2@124.934,95.885 pad.2@127.245,95.885 R36.2 U1.16 U20.3 | length 26.8
  Top Layer w0.27: U1.16@117.627,108.478 122.374,108.478 123.156,107.696 123.156,101.727 124.934,99.949 pad.2@124.934,95.885
  Top Layer w0.5: pad.2@127.245,95.885 128.996,94.134 R36.2@128.996,90.551
  Bottom Layer w0.27: pad.2@124.934,95.885 pad.2@127.245,95.885
DI6: pad.2@124.299,103.886 pad.2@127.888,103.878 R35.2 U1.17 U21.3 | length 20.8
  Top Layer w0.27: U1.17@117.627,108.978 123.27,108.979 124.045,108.204 124.045,104.267 124.045,104.14 pad.2@124.299,103.886
  Top Layer w0.5: U21.3@127.245,104.521 pad.2@127.888,103.878 128.996,102.77 R35.2@128.996,99.187
  Bottom Layer w0.27: pad.2@124.299,103.886 pad.2@127.888,103.878
DI7: R34.2 U1.18 U22.3 | length 17.9
  Top Layer w0.27: U1.18@117.627,109.478 123.923,109.479 125.823,111.379 125.823,112.522 126.458,113.157 U22.3@127.245,113.157
  Top Layer w0.5: U22.3@127.245,113.157 128.996,111.406 R34.2@128.996,107.823
DI8: R33.2 U1.19 U23.3 | length 20.8
  Top Layer w0.27: U1.19@117.627,109.978 123.532,109.977 125.188,111.633 125.188,113.03 127.728,115.57 128.488,115.57 R33.2@128.996,116.078
  Top Layer w0.5: U23.3@127.245,121.412 128.996,119.661 R33.2@128.996,116.078
DO1: pad.2@102.839,109.728 pad.2@114.52,109.347 R110.2 U1.20 | length 18.8
  Top Layer w0.27: pad.2@114.52,109.347 114.52,109.982 115.028,110.49 U1.20@117.627,110.478
  Bottom Layer w0.27: pad.2@102.839,109.728 102.839,108.074 103.979,106.934 111.345,106.934 113.123,108.712 113.885,108.712 pad.2@114.52,109.347
DO2: pad.2@106.646,110.363 pad.2@110.837,109.982 R46.2 U1.45 | length 19
  Top Layer w0.27: R46.2@99.661,105.921 102.204,105.921 pad.2@106.646,110.363 ; 109.948,108.458 109.128,108.478 110.309,108.478 110.71,108.077 111.345,108.077 111.599,108.331 111.599,109.601 111.218,109.982 pad.2@110.837,109.982
  Bottom Layer w0.27: pad.2@106.646,110.363 106.773,110.49 110.075,110.49 110.583,109.982 pad.2@110.837,109.982
DO3: pad.2@98.01,111.125 pad.2@99.788,140.459 pad.2@103.852,111.379 pad.2@107.535,107.696 R47.2 U1.46 | length 43.1
  Top Layer w0.27: pad.2@98.01,111.125 98.899,111.125 99.28,111.506 103.725,111.506 pad.2@103.852,111.379 ; pad.2@107.535,107.696 107.817,107.978 U1.46@109.127,107.978
  Bottom Layer w0.27: pad.2@98.01,111.125 98.01,121.412 99.915,123.317 99.915,140.332 pad.2@99.788,140.459 ; pad.2@103.852,111.379 pad.2@107.535,107.696
DO4: pad.2@116.171,115.443 R48.2 U1.25 | length 36.4
  Top Layer w0.27: U1.25@116.128,113.977 116.128,114.808 116.171,114.851 pad.2@116.171,115.316
  Bottom Layer w0.27: v1(101.566,133.22) 101.566,127.381 100.677,126.492 100.677,116.078 102.582,114.173 111.472,114.173 113.504,116.205 115.409,116.205 pad.2@116.171,115.443 pad.2@116.171,115.316
DO5: pad.2@101.566,101.473 pad.2@113.504,112.268 R56.2 U1.26 | length 65.1
  Top Layer w0.27: R56.2@100.677,66.17 100.423,66.424 100.423,80.772 98.772,82.423 98.772,87.122 101.566,89.916 pad.2@101.566,101.346 ; pad.2@113.504,112.268 113.885,112.268 114.012,112.141 115.282,112.141 115.627,112.486 U1.26@115.627,113.978
  Bottom Layer w0.27: pad.2@101.566,101.346 pad.2@101.566,101.473 100.55,102.489 100.55,111.252 102.074,112.776 111.472,112.776 111.98,112.268 pad.2@113.504,112.268
DO6: pad.2@103.979,102.87 pad.2@114.393,112.776 R51.2 U1.27 | length 73.3
  Top Layer w0.27: R51.2@100.677,59.439 102.582,61.344 102.582,68.58 101.439,69.723 101.439,81.153 99.661,82.931 99.661,86.868 102.455,89.662 102.455,100.203 103.979,101.727 pad.2@103.979,102.87 ; pad.2@114.393,112.776 114.901,112.776 115.155,113.03 115.155,113.95 U1.27@115.127,113.978
  Bottom Layer w0.27: pad.2@103.979,102.87 101.693,105.156 101.693,111.125 102.709,112.141 110.71,112.141 112.107,110.744 113.25,110.744 114.266,111.76 114.266,112.649 pad.2@114.393,112.776
DO7: pad.2@99.661,99.952 pad.2@114.647,115.316 R50.2 U1.28 | length 30.8
  Top Layer w0.27: U1.28@114.627,113.978 pad.2@114.647,115.316
  Bottom Layer w0.27: pad.2@99.661,99.952 99.661,112.395 100.804,113.538 114.266,113.538 114.647,113.919 pad.2@114.647,115.316
DO8: pad.2@100.169,93.218 pad.2@111.091,104.267 R49.2 U1.2 | length 17.9
  Top Layer w0.27: pad.2@111.091,104.267 111.127,104.303 U1.2@111.127,105.478
  Bottom Layer w0.27: pad.2@100.169,93.218 101.058,93.218 103.598,95.758 104.614,95.758 105.249,96.393 105.249,98.425 pad.2@111.091,104.267
F1_1: F1.1 U2.2 | length 5.4
  Top Layer w0.5: U2.2@151.858,140.97 152.569,141.68 F1.1@152.569,146.05
F5_2: F5.2 U2.1 | length 5.4
  Top Layer w0.5: F5.2@151.807,130.556 151.807,135.838 U2.1@151.858,135.89
GND: C2.1 C8.2 C10.1 C11.2 C20.2 C23.2 C24.1 C28.2 C30.2 C31.2 CN1.9 CN2.9 D1.2 D2.2 D3.2 D4.2 D6.2 D17.2 D18.2 D19.2 D20.2 L1.2 LED1.2 LED_IN1.2 LED_IN2.2 LED_IN3.2 LED_IN4.2 LED_IN5.2 LED_IN6.2 LED_IN7.2 LED_IN8.2 M1.2 M1.3 P5.2 P5.6 pad.2@69.494,170.434 pad.2@86.12,121.285 pad.2@86.12,132.207 pad.2@86.12,143.256 pad.2@86.149,110.009 pad.2@86.501,87.376 pad.2@86.628,98.679 pad.2@86.755,76.454 pad.2@87.145,143.262 pad.2@87.162,121.28 pad.2@87.167,132.212 pad.2@87.178,110.009 pad.2@87.479,87.386 pad.2@87.622,98.682 pad.2@87.675,76.454 pad.2@88.05,66.24 pad.2@88.866,67.056 pad.2@90.416,104.775 pad.2@90.416,112.395 pad.2@90.517,145.796 pad.2@90.898,138.557 pad.2@91.66,94.613 pad.2@91.658,87.122 pad.2@96.461,78.74 pad.2@102.709,76.2 pad.2@107.408,87.503 pad.2@113.377,75.946 pad.2@123.41,53.848 pad.2@123.41,74.546 pad.2@132.808,70.358 pad.2@133.57,61.722 pad.2@136.489,57.912 pad.2@136.489,66.802 pad.2@136.489,84.074 pad.2@136.489,92.329 pad.2@136.489,100.965 pad.2@136.489,109.474 pad.2@136.489,117.856 pad.2@136.498,75.819 pad.2@136.499,62.23 pad.2@136.499,70.993 pad.2@136.499,79.756 pad.2@136.499,88.138 pad.2@136.499,96.774 pad.2@136.499,105.41 pad.2@136.499,113.665 pad.2@136.499,122.301 Q9.3 R4.1 R5.1 R9.1 R11.1 R30.3 R31.2 R38.1 R40.1 R42.1 R43.1 R52.2 R53.2 R54.2 R55.1 R74.1 R84.2 R85.2 R86.2 R87.2 R88.2 R89.2 R90.2 R91.2 U3.2 U5.2 U6.2 U7.3 U9.2 U11.3 U13.4 U14.5 U15.2 U18.1 U19.2 U20.2 U21.2 U22.2 U23.2 U24.3 U25.3 U27.8 U28.4 U29.4 U31.2 U34.8 U36.2 | length 765.4
  Top Layer w0.3: LED1.2@111.853,142.247 114.514,142.247 117.568,139.192 U15.2@120.997,139.192 ; C23.2@118.78,70.866 118.78,71.316 120.362,72.898 U28.4@120.362,73.876 121.033,74.546 R31.2@123.41,74.546
  Top Layer w0.5: U18.1@59.656,67.691 64.353,67.691 R90.2@65.75,69.088 65.75,70.355 66.26,70.866 67.784,70.866 68.419,71.501 68.419,133.096 67.025,134.49 R87.2@66.514,134.49 ; 63.08,67.691 63.08,61.851 R91.2@64.861,60.071 64.861,58.677 66.006,57.531 73.372,57.531 73.626,57.277 75.531,55.372 81.244,55.372 82.643,56.772 82.836,56.965 86.834,56.965 87.284,56.965 88.866,58.547 pad.2@88.866,67.056 88.909,67.099 91.912,67.099 R55.1@91.912,67.437 ; R89.2@66.133,78.229 68.419,78.214 ; R88.2@66.133,89.659 68.419,89.672 ; R84.2@66.133,100.708 66.212,100.787 68.419,100.787 ; R86.2@66.387,123.441 68.412,123.441 68.419,123.434 ; R85.2@66.514,112.011 68.419,111.986 ; 88.866,59.962 92.056,59.962 R54.2@92.166,60.071 ; R52.2@91.658,87.122 94.708,83.82 94.693,83.82 94.693,82.296 94.692,79.137 95.089,78.74 U34.8@96.461,78.74 ; C31.2@94.692,129.667 94.692,126.635 95.216,126.111 U27.8@96.334,126.111 ; U29.4@103.433,76.2 105.054,74.579 C20.2@105.054,73.914 C24.1@105.054,70.866 105.162,70.758 R30.3@105.162,66.167 ; pad.2@107.408,87.503 P5.2@111.345,83.566 ; pad.2@113.377,75.946 119.6,75.946 120.362,75.184 U28.4@120.362,73.876 ; U13.4@123.41,53.69 123.441,53.721 134.459,53.721 136.489,55.756 ; U3.2@133.545,61.341 134.434,62.23 LED_IN1.2@136.498,62.23 ; U5.2@133.545,70.358 134.18,70.993 LED_IN2.2@136.498,70.993 ; U9.2@133.545,78.74 134.561,79.756 LED_IN3.2@136.498,79.756 ; U19.2@133.545,87.376 134.307,88.138 LED_IN4.2@136.498,88.138 ; U20.2@133.545,95.885 134.434,96.774 LED_IN5.2@136.498,96.774 ; U21.2@133.545,104.521 134.434,105.41 LED_IN6.2@136.498,105.41 ; U22.2@133.545,113.157 134.053,113.665 134.779,113.665 LED_IN7.2@136.498,113.665 ; U23.2@133.545,121.412 134.434,122.301 134.797,122.301 LED_IN8.2@136.498,122.301
  Top Layer w1: C2.1@69.494,170.434 69.562,170.365 U6.2@69.562,165.486 69.758,165.29 C10.1@69.758,161.29 79.595,161.29 81.754,163.449 86.58,163.449 88.739,161.29 88.739,154.178 90.644,152.273 92.176,152.273 L1.2@92.239,152.209 ; D19.2@86.121,121.285 pad.2@87.162,121.28 ; D18.2@86.121,132.207 pad.2@87.167,132.212 ; D17.2@86.121,143.256 pad.2@87.145,143.262 ; D20.2@86.121,109.982 pad.2@86.149,110.009 pad.2@87.178,110.009 ; D3.2@86.502,87.376 pad.2@87.479,87.386 ; D4.2@86.629,98.679 pad.2@87.622,98.682 ; D2.2@86.756,76.454 pad.2@87.675,76.454 ; D1.2@87.01,65.532 88.577,67.099 pad.2@88.909,67.099
  Top Layer w1.5: U36.2@125.442,151.13 125.442,153.162 128.076,155.795 D6.2@136.11,155.796 149.885,155.795 M1.3@150.215,155.466 ; R4.1@136.489,57.912 136.489,55.756 137.634,54.61 148.683,54.61 151.858,57.785 U31.2@151.858,59.436
  Top Layer w2: L1.2@92.239,152.209 101.797,152.209 C28.2@102.328,151.678 104.781,151.678 108.678,155.575 109.704,155.575 M1.2@109.814,155.466
  Bottom Layer w0.5: 88.612,87.399 91.381,87.399 pad.2@91.658,87.122 ; 88.612,94.602 92.166,94.615 ; 88.612,104.772 pad.2@90.416,104.775 ; 88.612,112.392 pad.2@90.416,112.395 ; 88.612,127.569 88.612,123.698 93.184,123.698 94.693,125.207 C31.2@94.693,129.667 ; 88.612,138.557 pad.2@90.898,138.557 ; 88.612,145.796 pad.2@90.517,145.796 ; C30.2@94.692,82.296 94.819,82.423 99.407,82.423 100.55,83.566 P5.6@101.185,83.566 101.185,83.947 102.709,85.471 106.265,85.471 107.408,86.614 pad.2@107.408,87.503 ; pad.2@96.461,78.74 99.001,76.2 pad.2@102.709,76.2 ; P5.2@111.345,83.566 111.345,78.486 113.377,76.454 pad.2@113.377,75.946 ; Q9.3@119.981,58.908 120.997,58.928 123.41,56.515 pad.2@123.41,53.848 ; U15.2@120.997,139.192 122.394,139.192 123.029,139.827 123.029,143.383 121.701,144.711 C8.2@121.701,146.939 123.664,146.939 125.442,148.717 U36.2@125.442,151.13 ; pad.2@123.41,74.546 124.172,73.784 124.172,69.342 125.569,67.945 131.157,67.945 132.808,69.596 pad.2@132.808,70.358 ; R74.1@129.377,60.071 129.379,61.087 130.014,61.722 pad.2@133.57,61.722
  Bottom Layer w1: pad.2@69.494,170.434 76.166,170.434 78.353,168.247 C11.2@100.931,168.247 ; pad.2@86.12,121.285 pad.2@87.162,121.28 88.612,121.272 ; pad.2@86.12,132.207 87.166,132.211 88.612,132.217 ; pad.2@86.12,143.256 pad.2@87.145,143.262 88.612,143.271 ; pad.2@86.121,109.982 pad.2@86.149,110.009 pad.2@87.178,110.009 88.612,110.009 ; pad.2@86.501,87.376 pad.2@87.479,87.386 88.612,87.399 ; pad.2@86.628,98.679 88.612,98.687 ; pad.2@86.755,76.454 88.612,76.451
  Bottom Layer w1.5: CN2.9@61.815,79.248 58.767,76.2 58.767,72.771 60.545,70.993 62.45,70.993 62.45,70.866 63.339,69.977 63.339,64.516 66.26,61.595 83.405,61.595 pad.2@88.05,66.24 pad.2@88.866,67.056 ; pad.2@88.909,67.099 88.612,67.396 88.612,146.812 92.295,150.495 92.295,152.154 L1.2@92.239,152.209 ; pad.2@136.489,57.912 pad.2@136.499,62.23 pad.2@136.489,66.802 pad.2@136.499,70.993 pad.2@136.489,75.565 ; pad.2@136.498,75.819 136.498,79.756 pad.2@136.489,84.074 pad.2@136.499,88.138 pad.2@136.489,92.329 pad.2@136.499,96.774 pad.2@136.489,100.965 pad.2@136.499,105.41 pad.2@136.489,109.474 ; pad.2@136.499,122.301 pad.2@136.489,117.856 pad.2@136.499,113.665 pad.2@136.489,109.474 ; CN1.9@151.223,111.379 142.714,111.379 140.809,109.474 pad.2@136.489,109.474
  Bottom Layer w2: M1.2@109.814,155.466 M1.3@150.215,155.466